# EAGLE board Rough_Draft_Schematic (EAGLE 9.6.2)
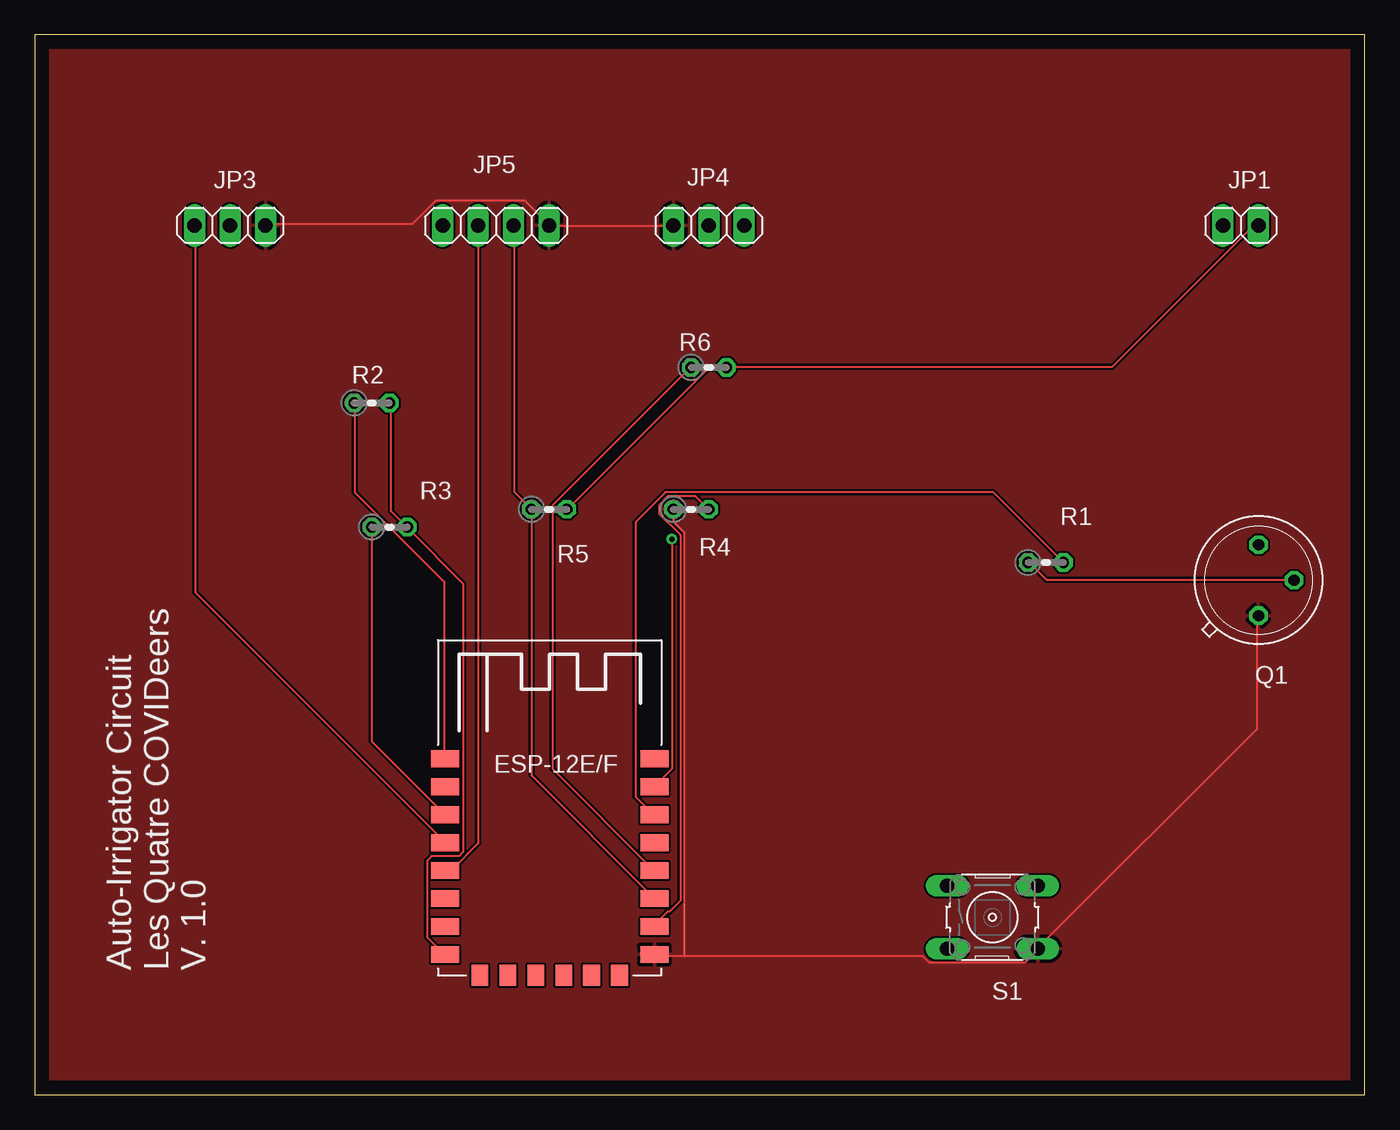
[diagram p0: board, top side]
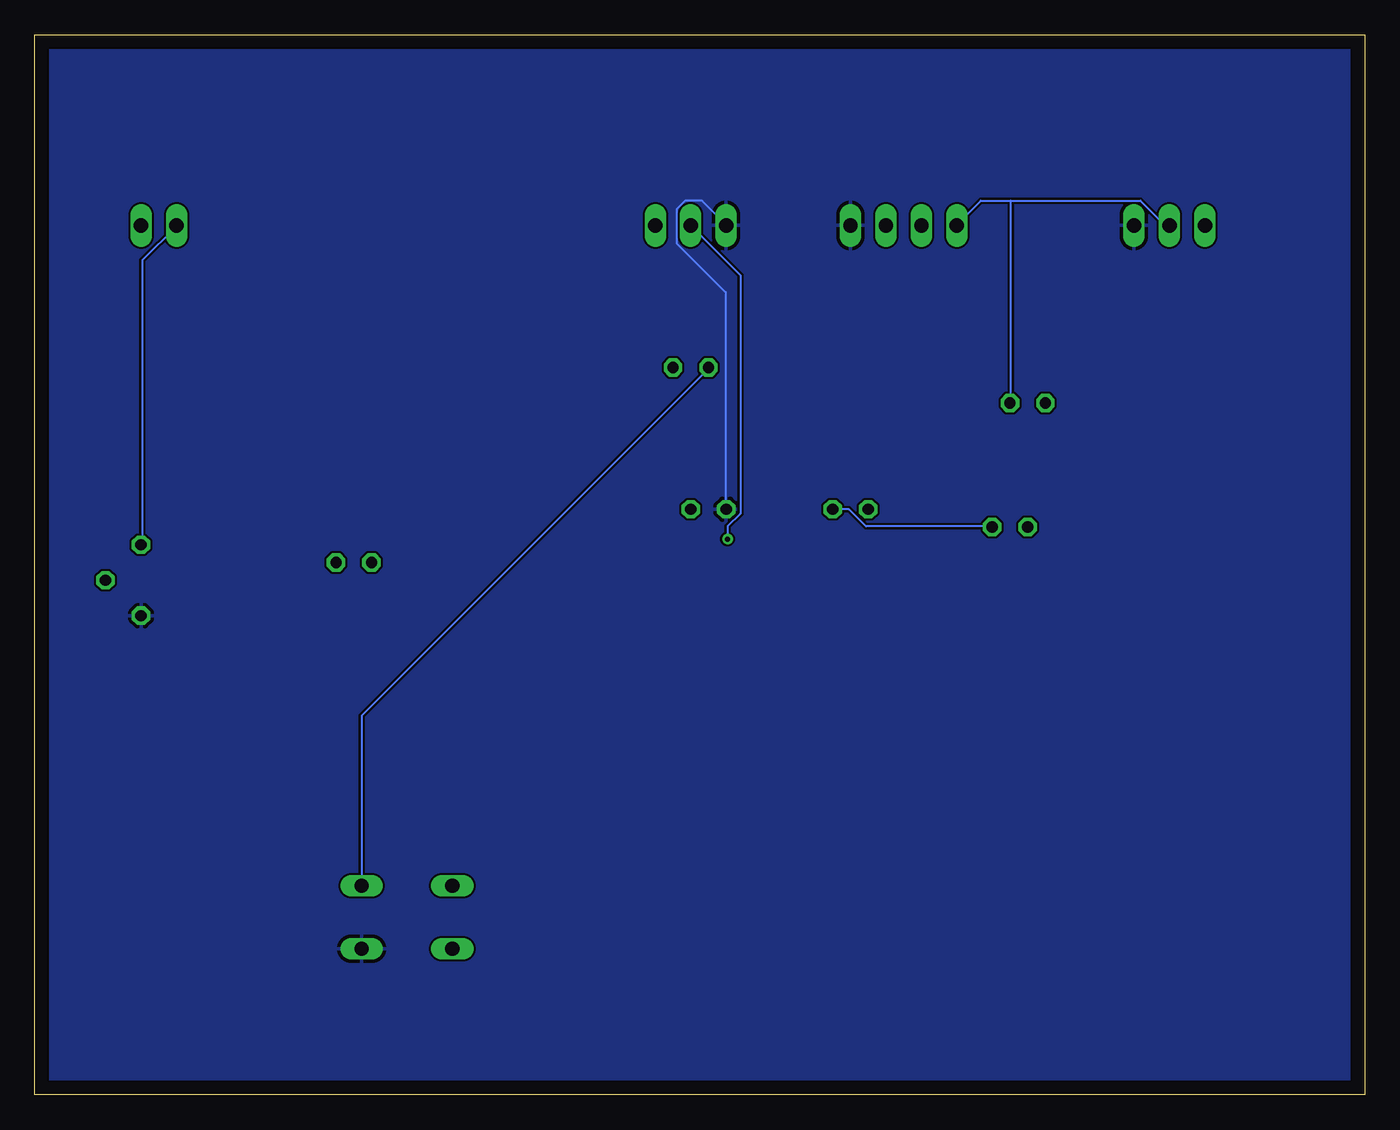
[diagram p1: board, bottom side, seen from below]

Size 95.23 x 75.87 mm. Coordinates in mm from the lower left corner, seen from the top.
Outline: 0,0 95.23,0 95.23,75.87 0,75.87 0,0
Copper layers (1*16): Top 0.035mm / dielectric 1.5mm / Bottom 0.035mm
Design rules "default": minimum track width 6mil, minimum drill 0.35mm, track to track 6mil, track to pad 6mil, pad to pad 6mil, via to via 6mil, smd to smd 6mil, copper to edge 40mil, drill to drill 6mil, minimum pad ring 10mil, minimum via ring 8mil, stop-mask expansion 4mil, vias tented up to drill 0mil, thermal gap 10mil

## Footprints (pad centres in the part's own frame; a part is rotated, then mirrored left to right if it is on the bottom)
ESP-12E = smd 2 x 1.2: ADC -7.46,5.53; EN -7.46,3.53; GND 7.54,-6.47; IO0 7.54,-0.47; IO2 7.54,-2.47; IO4 7.54,1.53; IO5 7.54,3.53; IO12 -7.46,-2.47; IO13 -7.46,-4.47; IO14 -7.46,-0.47; IO15 7.54,-4.47; IO16 -7.46,1.53; RST -7.46,7.53; RXD/IO3 7.54,5.53; TXD/IO1 7.54,7.53; VCC -7.46,-6.47 | smd 1.2 x 1.5: CS0 -4.96,-7.97; IO9 -0.96,-7.97; IO10 1.04,-7.97; MISO -2.96,-7.97; MOSI 3.04,-7.97; SCLK 5.04,-7.97
1X02 = drill 1.016 long: 1 -1.27,0; 2 1.27,0
1X03 = drill 1.016 long: 1 -2.54,0; 2 0,0; 3 2.54,0
1X04 = drill 1.016 long: 1 -3.81,0; 2 -1.27,0; 3 1.27,0; 4 3.81,0
TO5 = drill 0.813 octagon: 1 0,-2.54; 2 2.54,0; 3 0,2.54
0204V = drill 0.813 octagon: 1 -1.27,0; 2 1.27,0
B3F-10XX = drill 1.016 long: 1 -3.251,2.261; 2 3.251,2.261; 3 -3.251,-2.261; 4 3.251,-2.261

## Placement (x,y rotation side)
IC1  ESP-12E/F  [ESP-12E]  36.83,16.51 0 top
JP1  [1X02]  86.36,62.23 0 top
JP3  [1X03]  13.97,62.23 0 top
JP4  [1X03]  48.26,62.23 0 top
JP5  [1X04]  33.02,62.23 0 top
Q1  2N2102  [TO5]  87.63,36.83 0 top
R1  1k  [0204V]  72.39,38.1 0 top
R2  10k  [0204V]  24.13,49.53 0 top
R3  10k  [0204V]  25.4,40.64 0 top
R4  10k  [0204V]  46.99,41.91 0 top
R5  10k  [0204V]  36.83,41.91 0 top
R6  10k  [0204V]  48.26,52.07 0 top
S1  [B3F-10XX]  68.58,12.7 0 top

## Library data of the parts
IC1 = esp-12e-f
JP1 JP3-JP5 = pinhead
Q1 = transistor-npn
R1-R6 = rcl; SPICEPREFIX: R
S1 = switch-omron; MPN: B3F-1000; OC_FARNELL: 176432; OC_NEWARK: 36M3542

## Nets
GND: IC1.GND JP3.3 JP4.1 JP5.4 Q1.1 R4.1 S1.4
MOISTURE_SENSOR: IC1.IO2 JP5.3 R5.1
N$1: IC1.TXD/IO1
N$2: IC1.IO15 R4.2
N$3: JP4.3
N$4: IC1.RXD/IO3 JP4.2
N$5: IC1.EN R3.1
N$6: IC1.RST R2.1
N$8: IC1.IO0 R6.1 S1.2
N$10: IC1.IO14 JP5.2
N$12: IC1.IO5 R1.2
N$13: Q1.2 R1.1
N$14: JP1.1 Q1.3
VDD: IC1.VCC JP1.2 JP3.2 JP5.1 R2.2 R3.2 R5.2 R6.2
WATER_LEVEL_SENSOR: IC1.IO16 JP3.1

## Tracks (layer width: path | path; a pad name or v marks a point on that pad's centre or on a via)
GND
  Top 0.152: JP3.3 16.51,62.33 27.03,62.33 28.7,64.01 35.1,64.01 36.78,62.33 JP5.4 36.93,62.18 45.62,62.18 JP4.1 | 46.53,9.91 63.6,9.91 64.06,9.45 70.92,9.45 71.83,10.36 S1.4 71.83,10.52 87.53,26.21 87.53,34.29 Q1.1 | 46.53,9.91 44.4,9.91 IC1.GND | 46.53,9.91 46.53,40.23 45.77,41 45.77,41.91 R4.1
  Bottom 0.152: R4.1 45.77,41.91 45.77,57.45 49.28,60.96 49.28,63.4 48.67,64.01 47.45,64.01 45.77,62.33 JP4.1
  pour Top: 0.04,0 0.04,75.9 95.24,75.9 95.24,75.8 95.24,0
  pour Bottom: 0.04,0 0.04,75.9 95.24,75.9 95.24,0
MOISTURE_SENSOR
  Top 0.152: IC1.IO2 44.25,14.17 35.56,22.86 R5.1 34.34,43.13 34.34,62.18 JP5.3
N$2
  Top 0.152: IC1.IO15 44.4,12.19 45.31,13.11 45.47,13.11 46.23,13.87 46.23,40.08 44.7,41.6 44.7,42.22 45.31,42.82 47.3,42.82 48.21,41.91 R4.2
N$4  (via drill 0.35)
  Top 0.152: v45.62,39.78 45.62,23.32 44.4,22.1 IC1.RXD/IO3
  Bottom 0.152: v45.62,39.78 45.62,40.69 44.7,41.6 44.7,58.67 JP4.2
N$5
  Top 0.152: R3.1 24.13,25.3 29.31,20.12 IC1.EN
N$6
  Top 0.152: IC1.RST 29.31,24.08 29.31,36.73 22.91,43.13 22.91,49.53 R2.1
N$8
  Top 0.152: IC1.IO0 44.25,16.15 37.08,23.32 37.08,42.22 46.99,52.12 R6.1
  Bottom 0.152: S1.2 71.83,27.13 46.99,51.97 R6.1
N$10
  Top 0.152: JP5.2 31.75,17.98 29.92,16.15 29.46,16.15 IC1.IO14
N$12
  Top 0.152: R1.2 68.63,43.13 45.16,43.13 43.03,41 43.03,21.34 44.25,20.12 IC1.IO5
N$13
  Top 0.152: Q1.2 90.12,36.88 72.44,36.88 71.22,38.1 R1.1
N$14
  Bottom 0.152: Q1.3 87.53,39.47 87.53,59.74 85.09,62.18 JP1.1
VDD
  Top 0.152: IC1.VCC 29.31,10.06 28.09,11.28 28.09,16.76 28.4,17.07 30.38,17.07 30.68,17.37 30.68,36.58 26.72,40.54 R3.2 26.57,40.69 25.5,41.76 25.5,49.53 R2.2 | R5.2 38.15,41.91 48.21,51.97 49.43,51.97 R6.2 49.58,52.12 77.16,52.12 87.22,62.18 87.53,62.18 JP1.2
  Bottom 0.152: 25.35,64.01 27.48,64.01 29.16,62.33 JP5.1 | 25.35,64.01 16.05,64.01 14.38,62.33 14.07,62.33 JP3.2 | R5.2 36.93,41.91 35.71,40.69 26.72,40.69 R3.2 | 25.35,64.01 25.35,49.53 R2.2
WATER_LEVEL_SENSOR
  Top 0.152: IC1.IO16 29.31,18.14 11.48,35.97 11.48,62.18 JP3.1

## Text on the board
tPlace: Auto-Irrigator Circuit / Les Quatre COVIDeers / V. 1.0